# EAGLE board fabftdi-ch340g (EAGLE 8.2.2)
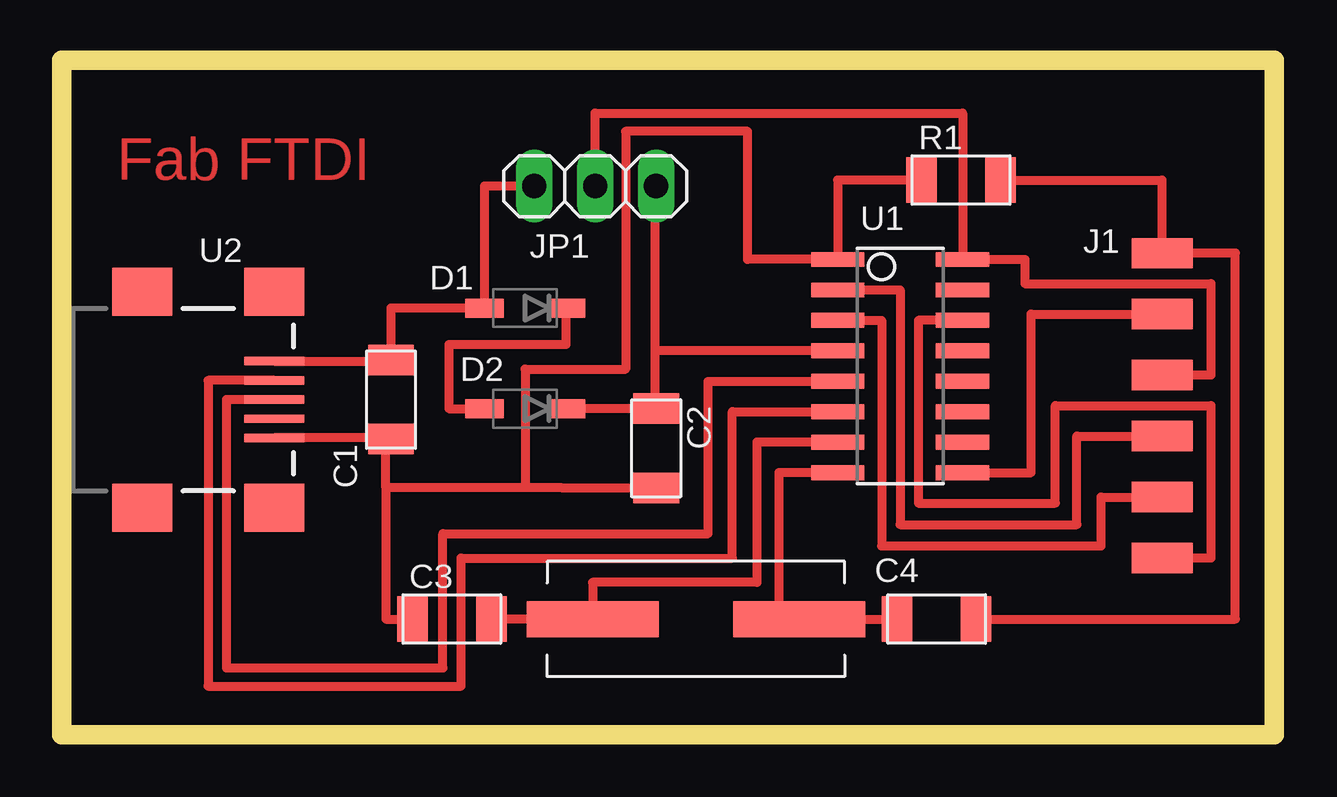
[diagram p0: board, top side]

Size 50.53 x 28.12 mm. Coordinates in mm from the lower left corner, seen from the top.
Outline: 0,0 50.53,0 50.53,28.12 0,28.12 0,0
Copper layers (1*16): Top 0.035mm / dielectric 1.5mm / Bottom 0.035mm
Design rules "default *": minimum track width 6mil, minimum drill 0.35mm, track to track 10mil, track to pad 10mil, pad to pad 10mil, via to via 8mil, smd to smd 8mil, copper to edge 40mil, drill to drill 6mil, minimum pad ring 10mil, minimum via ring 8mil, stop-mask expansion 4mil, vias tented up to drill 0mil, thermal gap 10mil

## Footprints (pad centres in the part's own frame; a part is rotated, then mirrored left to right if it is on the bottom)
C1206FAB = smd 1.27 x 1.905: 1 -1.651,0; 2 1.651,0
SOD123 = smd 1.6 x 0.8: ANODE 1.7,0; CATHODE -1.7,0
1X06SMD = smd 2.54 x 1.27: 1 0,6.35; 2 0,3.81; 3 0,1.27; 4 0,-1.27; 5 0,-3.81; 6 0,-6.35
1X03 = drill 1.016 long: 1 -2.54,0; 2 0,0; 3 2.54,0
R1206FAB = smd 1.27 x 1.905: 1 -1.651,0; 2 1.651,0
SOIC16 = smd 0.61 x 2.21: 1 -3.81,-2.603; 2 -2.54,-2.603; 3 -1.27,-2.603; 4 0,-2.603; 5 1.27,-2.603; 6 2.54,-2.603; 7 3.81,-2.603; 8 5.08,-2.603; 9 5.08,2.603; 10 3.81,2.603; 11 2.54,2.603; 12 1.27,2.603; 13 0,2.603; 14 -1.27,2.603; 15 -2.54,2.603; 16 -3.81,2.603
USB_MINIB = smd 2.5 x 0.35: D+ 3.77,0; D- 3.77,0.8; GND 3.77,-1.6; ID 3.77,-0.8; VBUS 3.77,1.6 | smd 2.5 x 2: SHIELD@1 -1.73,-4.5; SHIELD@2 -1.73,4.5; SHIELD@3 3.77,4.5; SHIELD@4 3.77,-4.5
CRYSTAL-SMD-10.5X4.8-2PIN = smd 5.5 x 1.5: P$1 -4.3,0; P$2 4.3,0

## Placement (x,y rotation side)
C1  10u  [C1206FAB]  13.72,13.97 270 top
C2  10n  [C1206FAB]  24.77,11.94 270 top
C3  22p  [C1206FAB]  16.26,4.83 0 top
C4  22p  [C1206FAB]  36.45,4.83 180 top
D1  [SOD123]  19.3,17.78 180 top
D2  [SOD123]  19.3,13.59 180 top
J1  FTDI  [1X06SMD]  45.85,13.72 0 top
JP1  [1X03]  22.23,22.86 0 top
R1  0  [R1206FAB]  37.47,23.11 0 top
U1  CH340G  [SOIC16]  34.92,16 270 top
U2  USB_MINIB  [USB_MINIB]  5.08,13.97 0 top
Y1  12MHz  [CRYSTAL-SMD-10.5X4.8-2PIN]  26.42,4.83 180 top

## Library data of the parts
C1-C4 D1 D2 J1 R1 U1 U2 = 00fab
JP1 = pinhead
Y1 = SparkFun-FreqCtrl

## Nets
3V3: C2.1 D2.CATHODE JP1.3 U1.4
5V: C1.1 D1.ANODE JP1.1 U2.VBUS
D+: U1.5 U2.D+
D-: U1.6 U2.D-
GND: C1.2 C2.2 C3.1 R1.1 U1.1 U2.GND
GND': C4.1 J1.1 R1.2
N$1: C4.2 U1.8 Y1.P$1
N$2: C3.2 U1.7 Y1.P$2
N$4: D1.CATHODE D2.ANODE
N$9: J1.2 U1.9
N$10: J1.4 U1.2
N$11: J1.5 U1.3
N$12: J1.6 U1.14
VCC: J1.3 JP1.2 U1.16

## Tracks (layer width: path | path; a pad name or v marks a point on that pad's centre or on a via)
3V3
  Top 0.381: U1.4 24.71,16 | JP1.3 24.71,22.86 24.71,16 | 24.71,13.59 C2.1 | 24.71,13.59 D2.CATHODE | 24.71,16 24.71,13.59
5V
  Top 0.381: U2.VBUS 13.72,15.57 C1.1 13.72,17.78 D1.ANODE 17.6,22.86 JP1.1
D+
  Top 0.381: U2.D+ 6.86,13.97 6.86,2.79 15.88,2.79 15.88,8.38 26.92,8.38 26.92,14.73 U1.5
D-
  Top 0.381: U2.D- 6.1,14.77 6.1,2.03 16.64,2.03 16.64,7.37 27.94,7.37 27.94,13.46 U1.6
GND
  Top 0.381: 13.51,12.37 U2.GND | 13.51,12.37 13.72,12.37 C1.2 | 13.51,10.29 13.51,4.83 C3.1 | 13.51,10.29 13.51,12.37 | 20.86,10.29 C2.2 | 20.86,10.29 13.51,10.29 | 20.86,10.29 19.3,10.32 19.3,15.24 23.5,15.24 23.5,25.15 28.57,25.15 28.57,19.81 U1.1 32.32,23.11 R1.1
GND'
  Top 0.381: R1.2 45.85,23.11 J1.1 48.9,20.07 48.9,4.83 C4.1
N$1
  Top 0.381: C4.2 Y1.P$1 29.87,4.83 29.87,10.92 U1.8
N$2
  Top 0.381: C3.2 Y1.P$2 22.12,6.35 28.96,6.35 28.96,12.19 U1.7
N$3
  Top 0.076: 0,0 50.55,0 50.55,27.94 0,27.94 0,0
N$4
  Top 0.381: D1.CATHODE 21,16.26 16.13,16.26 16.13,13.59 D2.ANODE
N$9
  Top 0.381: 45.34,17.53 J1.2 40.39,17.53 40.39,10.92 U1.9
N$10
  Top 0.381: U1.2 34.92,18.54 34.92,8.76 42.29,8.76 42.29,12.45 J1.4
N$11
  Top 0.381: U1.3 34.16,17.27 34.16,7.87 43.31,7.87 43.31,9.91 J1.5
N$12
  Top 0.381: U1.14 35.69,17.27 35.69,9.65 41.4,9.65 41.4,13.72 47.88,13.72 47.88,7.37 J1.6
VCC
  Top 0.381: JP1.2 22.23,25.91 37.53,25.91 U1.16 40.13,19.81 40.13,18.8 47.88,18.8 47.88,14.99 J1.3

## Text on the board
Top: Fab FTDI
tValues: 5V | 3V | 12 MHz